# Altium PCB zulu_a7.PcbDoc (part 3 of 3)
Units mm, origin at the board's own origin, x right, y up, seen from the top; angles counter-clockwise.
Board outline 69.85 x 25.4 mm, 6 copper layers (Top Layer, L2-GND, L3-SIG, L4-SIG, L5-VCC3V3, Bottom Layer), stack 1.65 mm thick; 178 components, 177 nets, 839 pads, 377 vias.
Unrouted connection lines stored in the file: 262.
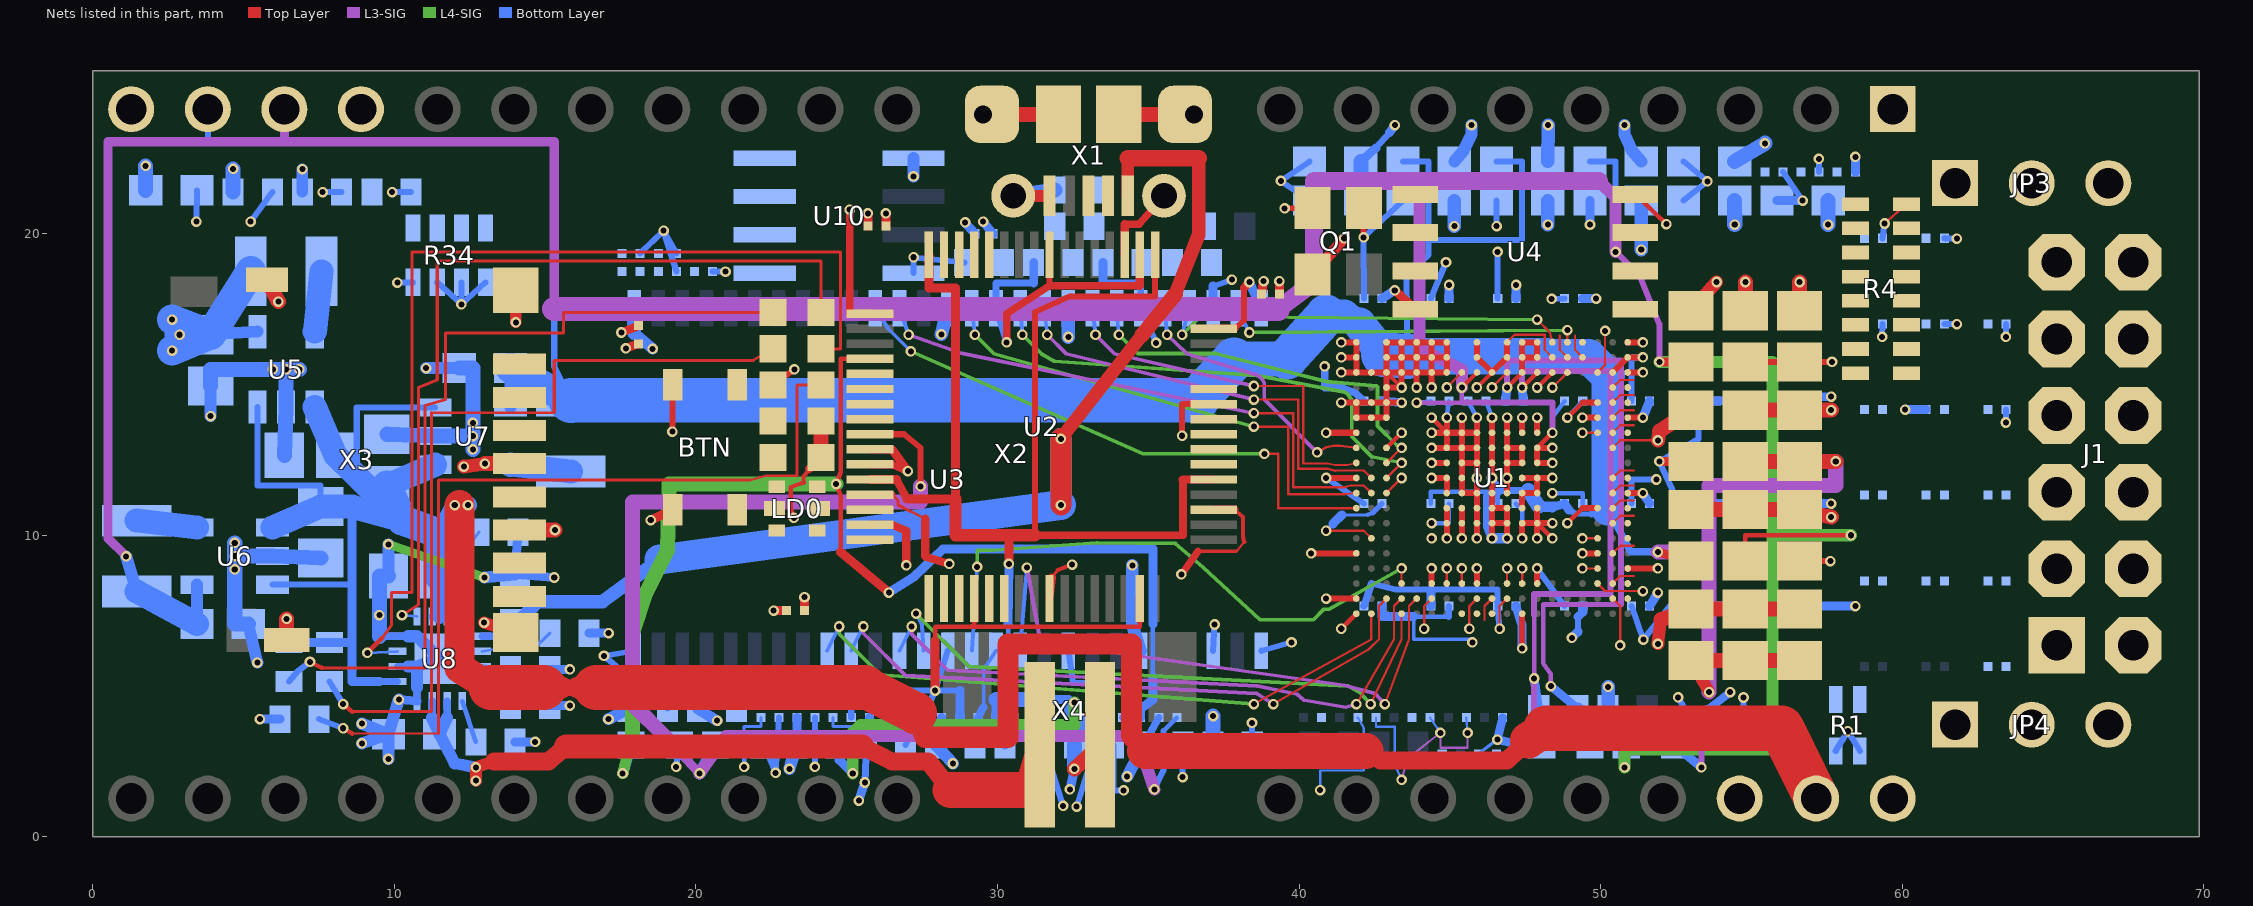
[diagram p6: the nets of this part, all layers, seen from the top]

## Via types
v1: diameter 0.35, hole 0.2, Top Layer to Bottom Layer, tented both sides, 377 vias

## Nets (pads, with @x,y where several pads share a name; then routed paths per layer and width w, separated by ;. In a path a pad name is that pad's centre, name@x,y a point inside that pad or via, vN(x,y) a via of type N, cw(c..) or ccw(c..) an arc to the next point about the centre after c; other vN are vias at no path point) (continued)
D6: U1.V5 U3.11 | length 20.7
  Top Layer w0.076: v1(42.85,4.4) 43.65,6.55 43.65,7.187 43.65,7.65 U1.V5@43.9,7.9
  L3-SIG w0.125: v1(30.975,8.925) 31.425,6.45 41.5,5.025 42.525,4.75 v1(42.85,4.4)
  Bottom Layer w0.125: U3.11@30.75,6.17 v1(30.975,8.925)
D7: U1.U4 U3.13 | length 19.4
  Top Layer w0.076: U1.U4@43.4,8.4 v1(43.4,8.9)
  L4-SIG w0.125: v1(29.325,8.95) 29.325,9.5 29.875,9.5 33.3,9.75 35.9,9.725 36.825,8.925 38.7,7.2 40.475,7.2 40.825,7.55 41,7.55 v1(43.4,8.9)
  Bottom Layer w0.125: U3.13@29.15,6.17 v1(29.325,8.95)
D8: U1.L1 U3.42 | length 16.4
  Top Layer w0.076: v1(38.5,13.6) 39.646,13.6 39.646,11.36 40.9,11.36 41.5,11.36 U1.L1@41.9,11.4
  L4-SIG w0.125: v1(29.25,16.65) 29.875,16.025 v1(38.5,13.6)
  Bottom Layer w0.125: U3.42@29.15,17.53 v1(29.25,16.65)
D9: U1.K3 U3.44 | length 16.2
  Top Layer w0.076: U1.K3@42.9,11.9 v1(43.4,12.4)
  L4-SIG w0.125: v1(30.825,16.65) 31.45,16.025 31.875,15.775 38.6,15.3 41.5,14.75 41.6,14.7 41.75,14.5 41.75,13.275 42.425,12.6 v1(43.4,12.4)
  Bottom Layer w0.125: U3.44@30.75,17.53 v1(30.825,16.65)
D10: U1.K2 U3.45 | length 14.5
  Top Layer w0.076: v1(38.5,14.5) 39.979,14.5 39.979,12.21 40.9,12.21 40.95,12.205 41.2,12.14 41.688,12.15 42.15,12.15 U1.K2@42.4,11.9
  L3-SIG w0.125: v1(31.65,16.65) 32.275,16.025 v1(38.5,14.5)
  Bottom Layer w0.125: U3.45@31.55,17.53 v1(31.65,16.65)
D11: U1.J1 U3.47 | length 12.5
  Top Layer w0.076: v1(38.5,14.95) 40.145,14.95 40.145,12.38 40.95,12.38 41.2,12.33 41.6,12.33 U1.J1@41.9,12.4
  L3-SIG w0.125: v1(33.25,16.65) 33.875,16.025 v1(38.5,14.95)
  Bottom Layer w0.125: U3.47@33.15,17.53 v1(33.25,16.65)
D12: U1.J3 U3.48 | length 12.9
  Top Layer w0.076: U1.J3@42.9,12.4 v1(43.4,12.9)
  L4-SIG w0.125: v1(34.025,16.65) 34.65,16.025 37.25,16.025 40.9,15.1 42.575,14.95 42.6,14.925 42.6,13.625 43.225,13 v1(43.4,12.9)
  Bottom Layer w0.125: U3.48@33.95,17.53 v1(34.025,16.65)
D13: U1.H1 U3.50 | length 9
  Top Layer w0.076: v1(40.6,12.75) 40.9,12.92 41.15,12.97 41.35,12.97 U1.H1@41.9,12.9
  L3-SIG w0.125: v1(35.625,16.65) 36.275,16.025 38.65,15.3 38.8,15.15 38.85,15.05 38.85,14.5 v1(40.6,12.75)
  Bottom Layer w0.125: U3.50@35.55,17.53 v1(35.625,16.65)
D14: U1.A14 U3.51 | length 13.9
  Top Layer w0.076: v1(47.9,17.15) 48.325,16.725 U1.A14@48.4,16.4
  L4-SIG w0.125: v1(36.125,16.65) 36.725,17.25 38,17.25 v1(47.9,17.15)
  Bottom Layer w0.125: v1(36.125,16.65) U3.51@36.35,17.53
D15: U1.A15 U3.53 | length 11.8
  Top Layer w0.076: U1.A15@48.9,16.4 v1(48.9,16.8)
  L4-SIG w0.125: v1(38.35,16.725) v1(48.9,16.8)
  Bottom Layer w0.125: U3.53@37.95,17.53 v1(38.35,16.725)
DONE: R4.2 U2.22
DONE-PU: R4.9 R4.10
EE-CLK: R96.1 U2.62 U10.2
EE-CS: R98.1 U2.63 U10.1
EE-DATA: R101.2 U2.61 U10.3
EE-DATA-DO: R97.1 R101.1 U10.4
FLASH-CS#: R7.1 U1.K19 U4.1
FLASH-D00: U1.D18 U4.5 | length 0.8
  Top Layer w0.076: U1.D18@50.4,14.9 50.65,15.15 51.112,15.15
FLASH-D01: U1.D19 U4.2
FLASH-D02: R2.1 U1.G18 U4.3 | length 0.8
  Top Layer w0.076: U1.G18@50.4,13.4 50.65,13.65 51.112,13.65
FLASH-D03: R6.1 U1.F18 U4.7 | length 0.8
  Top Layer w0.076: U1.F18@50.4,13.9 50.65,14.15 51.112,14.15
FPGA-CCLK: U1.C11 U4.6 | length 0.7
  Top Layer w0.076: v1(46.4,14.9) U1.C11@46.9,15.4
FPGA-DONE: R4.7 R4.15 U1.U12 | length 0.5
  Top Layer w0.076: U1.U12@47.4,8.4 v1(47.4,8.9)
FPGA-INIT#: R1.1 U1.U11 | length 0.5
  Top Layer w0.076: U1.U11@46.9,8.4 v1(46.9,8.9)
FPGA-TCK: R4.11 R5.2 U1.C8 | length 0.7
  Top Layer w0.076: v1(44.9,14.9) U1.C8@45.4,15.4
FPGA-TDI: R4.14 U1.W10
FPGA-TDO: R4.13 U1.W8
FPGA-TMS: R4.12 U1.W9
FT-PWREN#: U1.P17 U2.60 | length 0.5
  Top Layer w0.076: v1(49.4,9.9) U1.P17@49.9,9.9
FT-REF: R18.2 U2.6
FT-RESETN: R19.1 U2.14
FT-VCORE: C139.2 C152.2 C153.2 C154.2 U2.12 U2.37 U2.49 U2.64 | length 57.3
  Top Layer w0.2: 31.237,10 31.237,17.4 32.4,17.92 35.225,17.92 U2.49@35.225,19.3
  Top Layer w0.26: 31.237,10 36.15,10 36.15,11.85
  Top Layer w0.275: 26.65,11.85 27,11.2
  Top Layer w0.28: 36.15,11.85 U2.37@37.175,11.85
  Top Layer w0.3: U2.12@25.775,11.85 26.65,11.85 ; 27,11.2 28.6,11.2 28.6,18.2 27.725,18.2 U2.64@27.725,19.3 ; v1(30.375,9.05) 30.375,10
  Top Layer w0.4: 28.6,11.2 28.6,10 30.375,10 31.237,10
  L4-SIG w0.39: v1(25.2,2.1) 25.2,3.45
  L4-SIG w0.4: 25.2,3.45 25.45,3.7 32.55,3.7 v1(32.55,4.45)
  Bottom Layer w0.15: 30.35,5.3 30.35,7.05
  Bottom Layer w0.29: 24.75,2.55 v1(25.2,2.1)
  Bottom Layer w0.3: C139.2@24.65,3.05 24.75,2.55 ; C152.2@29.949,3.95 29.949,4.55 ; 30.35,4.55 30.35,5.3 ; 30.35,7.05 v1(30.375,9.05) ; C153.2@31.149,3.95 31.149,4.55 32.349,4.55 ; C154.2@32.349,3.95 32.349,4.55 ; v1(32.55,4.45) 32.349,4.55
  Bottom Layer w0.5: 29.949,4.55 30.35,4.55 31.149,4.55
FT-VPHY: C40.2 L4.1 U2.4 | length 41
  Top Layer w0.15: 24.8,9.45 24.8,11.3 v1(24.65,11.7) 24.8,12.1 24.8,15.85 U2.4@25.775,15.85
  Top Layer w0.3: 24.8,9.45 v1(26.4,8.1)
  L4-SIG w0.37: v1(17.57,2.1) 17.9,3.4
  L4-SIG w0.5: 17.9,3.4 17.9,6.8 18.3,8 19.05,9.5 19.1,11.7 v1(24.65,11.7)
  Bottom Layer w0.15: 35.15,5.3 35.15,7.05
  Bottom Layer w0.3: v1(26.4,8.1) 27.2,8.6 28.2,9.55 35.15,9.55 35.15,7.05 ; C40.2@34.749,3.95 34.749,4.25 35.15,4.55 35.15,5.3
  Bottom Layer w0.37: v1(17.57,2.1) L4.1@17.85,3.05
FT-VPLL: C41.2 L5.1 U2.9 | length 43.8
  Top Layer w0.2: U2.9@25.775,13.35 26.9,13.35 27.45,12.9 v1(27.45,11.625)
  L3-SIG w0.3: 19,3.3 v1(20.12,2.1)
  L3-SIG w0.39: v1(20.12,2.1) 21,3.35
  L3-SIG w0.4: 21,3.35 34.6,3.35 v1(35.2,1.575)
  L3-SIG w0.5: 19,3.3 17.9,4.4 17.9,7.4 17.9,11.1 27.45,11.1 v1(27.45,11.625)
  Bottom Layer w0.15: 35.5,3.5 C41.2@35.949,3.95
  Bottom Layer w0.2: v1(35.2,1.575) 35.5,2.2 35.5,3.5
  Bottom Layer w0.39: v1(20.12,2.1) L5.1@20.65,3.05
GND: C3.1 C4.1 C5.1 C6.1 C7.1 C8.1 C9.1 C11.1 C12.1 C13.1 C38.1 C40.1 C41.1 C78.1 C80.1 C82.1 C84.1 C85.2 C86.2 C87.2 C88.2 C89.2 C90.2 C91.2 C92.2 C93.2 C94.2 C95.2 C96.2 C97.2 C98.2 C99.2 C100.2 C101.2 C102.2 C103.2 C104.2 C105.2 C106.2 C107.2 C108.2 C109.2 C110.2 C111.2 C112.2 C113.2 C114.2 C115.2 C116.2 C117.2 C118.2 C119.2 C120.2 C121.2 C122.2 C133.1 C134.1 C135.1 C136.1 C137.1 C138.1 C139.1 C140.2 C141.2 C142.2 C143.2 C144.2 C145.2 C146.2 C147.1 C148.1 C149.1 C150.1 C151.1 C152.1 C153.1 C154.1 C155.1 C156.1 C157.1 C158.1 C159.1 J1.5 J1.11 JP3.3 L6.1 LD1.K LD2.K Q1.2 R5.1 R11.1 R13.2 R15.1 R17.2 R18.1 R21.1 R22.1 R78.1 R86.1 R102.1 R103.1 R104.1 R105.1 R106.1 U1.A1 U1.A3 U1.A4 U1.A5 U1.A6 U1.A7 U1.A9 U1.A11 U1.A19 U1.B1 U1.B3 U1.B4 U1.B5 U1.B6 U1.B7 U1.B9 U1.B11 U1.B14 U1.C1 U1.C2 U1.C3 U1.C4 U1.C5 U1.C6 U1.C7 U1.C10 U1.C19 U1.D3 U1.E1 U1.E2 U1.E3 U1.E17 U1.F1 U1.F2 U1.F3 U1.F19 U1.G1 U1.G7 U1.G8 U1.G9 U1.G11 U1.H7 U1.H8 U1.H9 U1.H11 U1.H12 U1.H18 U1.J8 U1.J9 U1.J11 U1.J12 U1.K8 U1.L8 U1.L9 U1.L11 U1.L19 U1.M9 U1.M13 U1.N9 U1.N12 U1.N13 U1.P2 U1.T19 U1.U6 U1.U9 U1.V18 U1.W1 U1.W12 U2.1 U2.5 U2.10 U2.11 U2.13 U2.15 U2.25 U2.35 U2.47 U2.51 U3.6 U3.12 U3.28 U3.41 U3.46 U3.52 U3.54 U4.4 U5.2 U6.2 U7.2 U8.4 U8.6 U8.8 U8.17 U10.5 X1.5 X1.MH1 X1.MH2 X1.MP1 X1.MP2 X1.MP3 X1.MP4 X1.MS1 X1.MS2 X2.1 X2.20 X2.21 X3.6 X3.G1 X3.G2 X3.G3 X3.G4 X4.2 | length 264.7
  Top Layer w0.076: 37.93,9.47 38.056,9.622 38.18,9.78 ; v1(40.9,10.15) 42.15,10.15 U1.P2@42.4,9.9 ; U1.A11@46.9,16.4 47.15,16.65 48.15,16.65 48.15,16.15 U1.B14@48.4,15.9 ; U1.V18@50.4,7.9 50.65,7.65 v1(50.65,6.35) ; U1.H18@50.4,12.9 50.65,13.15 v1(51.9,13.15)
  Top Layer w0.1: U2.13@26.5,11.35 26.7,11.15 26.7,11 27.6,10.55
  Top Layer w0.105: 36.65,9.47 37.93,9.47
  Top Layer w0.11: U2.25@31.8,8.6 32,8.85
  Top Layer w0.13: U2.35@37.85,10.85 38.14,10.6 38.14,9.95
  Top Layer w0.14: 23.57,11.75 23.57,11.95 LD1.K@23.76,12.2 ; 38.14,9.95 38.18,9.78
  Top Layer w0.145: 32,8.85 v1(32.475,9.025)
  Top Layer w0.15: v1(23.25,10.575) 23.15,10.9 23.15,11.6 23.57,11.75 ; v1(41.4,6.9) U1.W1@41.9,7.4 ; U1.C3@42.9,15.4 v1(43.4,14.9) ; v1(44.4,13.9) U1.G7@44.9,13.4 ; v1(45.9,14.9) U1.C10@46.4,15.4 ; U1.N13@47.9,10.4 v1(48.4,9.9) ; v1(48.9,13.9) 49.4,14.4
  Top Layer w0.18: U2.47@37.85,16.85 38.175,17.125
  Top Layer w0.2: v1(40.9,13.4) U1.G1@41.9,13.4 ; v1(41.4,14.4) U1.E1@41.9,14.4 ; v1(41.4,15.4) U1.C1@41.9,15.4 ; v1(41.4,15.9) U1.B1@41.9,15.9 ; v1(41.4,16.4) U1.A1@41.9,16.4 U1.B1@41.9,15.9 ; v1(43.4,14.4) U1.E3@42.9,14.4 ; v1(43.9,14.9) U1.C5@43.9,15.4 ; U1.U6@44.4,8.4 v1(44.4,8.9) ; v1(44.4,12.9) U1.H7@44.9,12.9 ; v1(44.4,13.4) U1.G7@44.9,13.4 ; v1(44.4,14.9) U1.C6@44.4,15.4 ; v1(44.9,13.9) U1.G7@44.9,13.4 ; v1(45.4,13.9) U1.G8@45.4,13.4 ; U1.U9@45.9,8.4 v1(45.9,8.9) ; v1(45.9,9.9) U1.N9@45.9,10.4 U1.M9@45.9,10.9 U1.L9@45.9,11.4 ; v1(45.9,13.9) U1.G9@45.9,13.4 ; U1.A9@45.9,16.4 U1.B9@45.9,15.9 U1.C10@46.4,15.4 U1.B11@46.9,15.9 U1.A11@46.9,16.4 ; U1.L11@46.9,11.4 v1(46.9,11.9) U1.J11@46.9,12.4 ; v1(46.9,13.9) U1.G11@46.9,13.4 U1.H11@46.9,12.9 ; v1(47.4,6.25) U1.W12@47.4,7.4 ; v1(47.4,9.9) U1.N12@47.4,10.4 U1.N13@47.9,10.4 ; v1(47.9,9.9) U1.N13@47.9,10.4 ; U1.M13@47.9,10.9 U1.N13@47.9,10.4 ; v1(48.4,10.4) U1.N13@47.9,10.4 ; 49.4,14.4 U1.E17@49.9,14.4 ; U1.T19@50.9,8.9 v1(51.9,8.9) ; U1.L19@50.9,11.4 v1(51.4,11.4) ; U1.F19@50.9,13.9 v1(51.4,13.9) ; U1.C19@50.9,15.4 v1(51.4,15.4) ; U1.A19@50.9,16.4 v1(51.4,16.4) ; U1.E1@41.9,14.4 U1.F1@41.9,13.9 U1.F2@42.4,13.9 U1.F3@42.9,13.9 ; U1.E1@41.9,14.4 U1.E2@42.4,14.4 U1.E3@42.9,14.4 ; U1.C1@41.9,15.4 U1.C2@42.4,15.4 U1.C3@42.9,15.4 ; U1.C1@41.9,15.4 U1.B1@41.9,15.9 ; U1.F3@42.9,13.9 U1.E3@42.9,14.4 ; U1.F3@42.9,13.9 U1.E3@42.9,14.4 ; U1.E3@42.9,14.4 U1.D3@42.9,14.9 ; U1.D3@42.9,14.9 U1.C3@42.9,15.4 ; U1.D3@42.9,14.9 v1(43.4,14.9) U1.C4@43.4,15.4 ; U1.C3@42.9,15.4 U1.B3@42.9,15.9 ; U1.C3@42.9,15.4 U1.C4@43.4,15.4 ; U1.B3@42.9,15.9 U1.B4@43.4,15.9 ; U1.B3@42.9,15.9 U1.A3@42.9,16.4 U1.A4@43.4,16.4 ; U1.C4@43.4,15.4 U1.B4@43.4,15.9 ; U1.C4@43.4,15.4 U1.C5@43.9,15.4 ; U1.B4@43.4,15.9 U1.B5@43.9,15.9 ; U1.B4@43.4,15.9 U1.A4@43.4,16.4 ; U1.A4@43.4,16.4 U1.A5@43.9,16.4 ; U1.C5@43.9,15.4 U1.B5@43.9,15.9 ; U1.C5@43.9,15.4 U1.C6@44.4,15.4 ; U1.B5@43.9,15.9 U1.B6@44.4,15.9 ; U1.B5@43.9,15.9 U1.A5@43.9,16.4 ; U1.A5@43.9,16.4 U1.A6@44.4,16.4 ; U1.C6@44.4,15.4 U1.B6@44.4,15.9 ; U1.C6@44.4,15.4 U1.C7@44.9,15.4 ; U1.C6@44.4,15.4 U1.C7@44.9,15.4 ; U1.B6@44.4,15.9 U1.B7@44.9,15.9 ; U1.B6@44.4,15.9 U1.A6@44.4,16.4 ; U1.A6@44.4,16.4 U1.A7@44.9,16.4 U1.B7@44.9,15.9 ; U1.H7@44.9,12.9 U1.H8@45.4,12.9 ; U1.H7@44.9,12.9 U1.G7@44.9,13.4 ; U1.G7@44.9,13.4 U1.G8@45.4,13.4 ; U1.C7@44.9,15.4 U1.B7@44.9,15.9 ; U1.J8@45.4,12.4 U1.K8@45.4,11.9 U1.L8@45.4,11.4 U1.L9@45.9,11.4 ; U1.J8@45.4,12.4 U1.J9@45.9,12.4 ; U1.J8@45.4,12.4 U1.H8@45.4,12.9 ; U1.H8@45.4,12.9 U1.H9@45.9,12.9 ; U1.H8@45.4,12.9 U1.G8@45.4,13.4 ; U1.G8@45.4,13.4 U1.G9@45.9,13.4 ; U1.L9@45.9,11.4 v1(45.9,11.9) U1.J9@45.9,12.4 ; U1.J9@45.9,12.4 U1.H9@45.9,12.9 ; U1.H9@45.9,12.9 U1.G9@45.9,13.4 ; U1.J11@46.9,12.4 U1.J12@47.4,12.4 U1.H12@47.4,12.9 U1.H11@46.9,12.9 ; U1.J11@46.9,12.4 U1.H11@46.9,12.9
  Top Layer w0.21: 38.175,17.125 38.175,18.2
  Top Layer w0.22: U2.13@25.775,11.35 U2.13@26.5,11.35
  Top Layer w0.24: v1(36.1,8.7) 36.65,9.47
  Top Layer w0.245: 34.225,20.32 34.7,20.32 X1.MH2@35.52,21.258
  Top Layer w0.26: v1(25.1,20.8) 25.1,17.35 U2.1@25.775,17.35 ; U2.11@26.5,12.35 v1(27.025,12.125)
  Top Layer w0.27: U2.25@31.725,7.9 U2.25@31.8,8.6
  Top Layer w0.28: LD1.K@23.76,12.2 LD1.K@24.15,12.585 ; U2.15@25.775,10.35 26.5,10.35 26.975,10.15 v1(26.975,9) ; U2.11@25.775,12.35 U2.11@26.5,12.35 ; U2.10@25.775,12.85 26.5,12.85 v1(27.025,12.125) ; 27.6,10.55 27.6,9.3 v1(28.4,9.05) ; U2.51@34.225,19.3 34.225,20.32 ; U2.35@37.175,10.85 U2.35@37.85,10.85 ; U2.47@37.175,16.85 U2.47@37.85,16.85 ; 38.175,18.2 v1(38.35,18.4)
  Top Layer w0.3: v1(17.525,16.725) C158.1@18.1,16.95 ; C159.1@23.6,7.5 v1(23.6,7.95) ; C155.1@26.3,20.25 v1(26.3,20.675) ; C157.1@39.35,18 v1(39.35,18.425) ; v1(43.175,18.125) U4.4@43.85,17.495
  Top Layer w0.365: Q1.2@40.45,18.65 v1(41.5,19.85)
  Top Layer w0.38: v1(14.025,17.06) X3.G4@14.025,18.125
  Top Layer w0.4: v1(12.975,7.1) X3.G1@14.025,6.775 ; X1.MH1@30.52,21.258 X1.5@31.72,21.258
  Top Layer w0.425: v1(51.9,6.4) 52,7.2
  Top Layer w0.43: C93.2@53,17.449 v1(53.85,18.4)
  Top Layer w0.465: v1(51.9,13.15) 51.95,13.45
  Top Layer w0.5: X3.G3@5.775,18.475 v1(6.15,17.75) ; X3.G2@6.425,6.525 v1(6.425,7.225) ; X3.6@14.15,10.175 v1(15.325,10.175) ; LD1.K@24.15,12.585 LD2.K@24.15,13.785 ; X1.MS1@29.52,23.959 X1.MP2@32.02,23.959 ; v1(32.55,2.25) X4.2@33.4,3.05 ; X1.MP3@34.02,23.959 X1.MS2@36.52,23.959 ; 51.95,13.45 C146.2@53,14.149 ; 52,7.2 C140.2@53,7.55 C141.2@54.8,7.55 C142.2@56.6,7.55 ; C143.2@53,10.849 C144.2@54.8,10.849 C145.2@56.6,10.849 v1(57.65,10.6) ; C85.2@54.8,14.149 C86.2@56.6,14.149 v1(57.65,14.149) ; C97.2@54.8,17.449 v1(54.8,18.4) ; C98.2@56.6,17.449 v1(56.6,18.4)
  L4-SIG w0.3: v1(9.8,9.7) v1(12.98,8.6)
  Bottom Layer w0.076: v1(40.7,1.55) 40.7,2.2 42.15,2.2 42.15,3.6 R13.2@41.95,3.95
  Bottom Layer w0.1: 21.6,3.45 21.6,3.65 22.15,3.65 C133.1@22.15,3.95 ; C135.1@24.55,3.95 24.55,3.65 25.75,3.65 26.95,3.65 C137.1@26.95,3.95 ; C152.1@29.349,3.95 29.35,3.65 30.5,3.65 31.75,3.65 C154.1@31.749,3.95
  Bottom Layer w0.105: R11.1@45.95,2.75 v1(46.575,3.225)
  Bottom Layer w0.11: 41.425,10.675 42.275,10.675 ; 43.8,7.3 43.8,6.55 45.65,6.55 v1(45.75,6.45)
  Bottom Layer w0.115: 29.54,4.3 29.54,5.55
  Bottom Layer w0.13: 29.54,5.55 U3.12@29.95,6.17 ; C154.1@31.749,3.95 C6.1@32.55,3.05 ; v1(40.9,10.15) 41.125,10.375
  Bottom Layer w0.145: 42.275,10.675 42.45,10.75
  Bottom Layer w0.15: v1(21.6,2.316) 21.6,3.45 ; v1(44.4,10.4) 44.97,10.4 C90.2@44.97,11.05 ; v1(44.9,13.9) C96.2@44.97,14.45 ; C92.2@45.6,14.45 v1(45.9,13.9) ; C89.2@47.19,11.05 47.4,10.84 v1(47.4,9.9) ; v1(48.4,11.4) 49.41,11.4 C91.2@49.41,11.05 ; v1(48.9,13.9) C95.2@49.41,14.45
  Bottom Layer w0.16: 43.8,7.3 44.97,7.3
  Bottom Layer w0.18: 42.45,10.75 C108.2@42.75,11.05
  Bottom Layer w0.205: 37.15,18.26 v1(37.775,18.475)
  Bottom Layer w0.21: C106.2@42.55,22.85 43,23.35 ; 44.97,7.3 C109.2@44.97,7.65 ; 49.25,6.8 49.25,7.3
  Bottom Layer w0.23: v1(25.6,1.8) C3.1@25.65,3.05 ; C40.1@34.149,3.95 C7.1@34.85,3.05
  Bottom Layer w0.24: 9.5,6.65 U8.8@10.1,6.65 10.45,6.65 ; U8.6@10.1,5.65 10.45,5.65 ; U8.4@10.75,4.5 10.75,4.95
  Bottom Layer w0.255: C152.1@29.349,3.95 29.54,4.3
  Bottom Layer w0.26: C7.1@34.85,3.05 C41.1@35.349,3.95
  Bottom Layer w0.265: 53.55,4.22 v1(54.3,4.8)
  Bottom Layer w0.28: 49.25,7.3 49.41,7.45
  Bottom Layer w0.29: v1(46.575,3.225) R17.2@46.75,3.95
  Bottom Layer w0.295: v1(46.575,3.225) 47.3,3.05
  Bottom Layer w0.3: v1(5.535,3.9) R78.1@6.2,3.9 ; v1(10.15,4.55) U8.4@10.75,4.5 ; R106.1@14.001,3.147 v1(14.667,3.147) ; R103.1@14.1,10.1 C150.1@14.002,8.7 v1(15.3,8.6) ; R102.1@15.151,4.349 v1(15.817,4.349) ; R105.1@15.151,5.55 v1(15.817,5.55) ; R104.1@16.453,6.752 v1(17.103,6.752) ; C139.1@23.35,3.05 C134.1@23.35,3.95 ; v1(25.4,1.2) v1(25.6,1.8) ; C3.1@25.65,3.05 25.75,3.65 C136.1@25.75,3.95 ; C4.1@27.95,3.05 C138.1@28.15,3.95 ; v1(29.525,20.4) C156.1@29.85,20 ; C5.1@30.25,3.05 30.5,3.65 C153.1@30.549,3.95 ; v1(32.4,1.575) v1(32.55,2.25) ; C6.1@32.55,3.05 C38.1@32.949,3.95 ; U3.52@37.15,17.53 37.15,18.26 ; v1(38.35,18.4) U3.54@38.75,17.53 ; 41.125,10.375 41.425,10.675 ; C106.2@42.05,22.4 C106.2@42.55,22.85 ; C113.2@42.75,7.65 42.75,7.3 43.8,7.3 ; C112.2@42.75,14.45 v1(43.4,14.4) ; C120.2@42.75,17.85 v1(43.175,18.125) ; 43,23.35 v1(43.18,23.6) ; C117.2@44.97,17.85 v1(44.975,18.3) ; C107.2@47.19,7.65 47.4,7 v1(47.4,6.25) ; C116.2@47.19,17.85 v1(47.2,18.3) ; v1(49.05,6.6) 49.25,6.8 ; 49.41,7.45 C110.2@49.41,7.65 ; C118.2@49.41,17.85 v1(49.85,17.85) ; v1(51.4,11.4) C111.2@51.63,11.05 ; v1(51.4,13.9) C114.2@51.63,14.45 ; C115.2@51.63,7.65 v1(51.9,8.1) ; R22.1@53.55,3.95 53.55,4.22 ; C122.2@53.85,7.65 v1(58.45,7.65) ; C119.2@53.85,11.05 v1(57.65,11.05) ; C121.2@53.85,14.45 v1(57.65,14.6) ; v1(60.1,14.17) R5.1@60.8,14.17
  Bottom Layer w0.36: R18.1@20.05,4.25 v1(20.7,3.85)
  Bottom Layer w0.37: 17.95,16.7 v1(18.56,16.18)
  Bottom Layer w0.38: C12.1@6.95,21.39 v1(6.95,22.14)
  Bottom Layer w0.4: v1(3.906,13.952) C80.1@3.906,14.952 ; C82.1@5.154,7.058 v1(5.454,5.779) ; v1(8.92,3.1) C151.1@9.8,3.398 ; v1(8.92,3.75) C151.1@9.8,3.398 ; v1(9.8,2.58) C151.1@9.8,3.398 ; C78.1@9.8,8.651 v1(9.8,9.7) ; v1(10.15,4.55) C151.1@9.8,3.398 ; 10.45,5.65 U8.17@10.75,5.65 ; 10.45,6.65 10.75,6.65 U8.17@11.5,5.9 U8.17@10.75,5.65 ; 10.75,4.95 U8.17@10.75,5.65 ; v1(11.05,15.542) C84.1@12.15,15.542 ; v1(12.98,8.6) C150.1@14.002,8.7 ; v1(17.1,3.9) C9.1@17.75,4.25 ; v1(23.1,2.25) C139.1@23.35,3.05 ; v1(27.215,21.9) U10.5@27.215,22.505 ; C4.1@27.95,3.05 v1(28.52,2.43) ; v1(34.3,2) C7.1@34.85,3.05 ; C87.2@45.15,22.4 45.45,22.75 45.72,23.3 v1(45.72,23.6) ; v1(50.8,23.6) 50.8,23.3 51.05,22.75 C94.2@51.349,22.4
  Bottom Layer w0.41: v1(34.475,9) 34.475,7 U3.6@34.75,6.17
  Bottom Layer w0.45: 17.95,16.7 U3.28@17.95,17.53 ; v1(28.14,16.66) U3.41@28.35,17.53 ; v1(32.35,16.575) U3.46@32.35,17.53 ; v1(45.15,20.25) C101.2@45.15,21.1 ; 47.3,3.05 L6.1@48.05,3.05 ; v1(48.25,20.3) C102.2@48.249,21.1 ; C88.2@48.249,22.4 v1(48.26,23.6) ; R21.1@50.25,4.25 v1(50.25,4.975) ; v1(51.35,19.475) C103.2@51.349,21.1
  Bottom Layer w0.5: C13.1@1.75,21.44 v1(1.75,22.25) ; C80.1@3.906,14.952 3.906,15.502 v1(5.968,15.502) v1(6.408,15.502) ; C11.1@4.65,21.39 v1(4.65,22.15) ; v1(4.704,9.75) v1(4.704,9.31) ; C82.1@5.154,7.058 4.704,7.058 v1(4.704,8.87) v1(4.704,9.31) ; C147.1@6.348,12.651 U5.2@6.408,14.252 v1(6.408,15.502) ; v1(6.848,15.502) v1(6.408,15.502) ; C148.1@7.555,9.25 U6.2@5.954,9.31 v1(4.704,9.31) ; 9.5,6.65 v1(9.5,7.35) 9.5,8.651 C78.1@9.8,8.651 ; C149.1@9.748,13.35 U7.2@11.35,13.29 v1(12.6,13.29) ; C84.1@12.15,15.542 12.6,15.542 v1(12.6,13.73) v1(12.6,13.29) ; v1(12.6,12.85) v1(12.6,13.29) ; X1.MH1@30.52,21.258 R86.1@31.9,21.45 ; v1(32.55,2.25) C6.1@32.55,3.05 ; C8.1@37.15,3.05 v1(37.15,4) ; C100.2@42.05,21.1 C106.2@42.05,22.4 ; C104.2@54.449,21.1 v1(54.45,20.3) ; C99.2@54.449,22.4 v1(55.45,23) ; C105.2@57.549,21.1 v1(57.55,20.3)
GNDADC: C123.2 C124.2 L6.2 U1.A12 U1.A13 U1.B12 U1.B13 U1.C12 | length 24.2
  Top Layer w0.15: v1(46.9,14.9) U1.C12@47.4,15.4
  Top Layer w0.2: U1.C12@47.4,15.4 U1.B12@47.4,15.9 ; U1.B12@47.4,15.9 U1.B13@47.9,15.9 U1.A13@47.9,16.4 U1.A12@47.4,16.4 U1.B12@47.4,15.9
  L3-SIG w0.15: 48.1,7.35 48.1,5.75 48.35,5.4 v1(48.35,5)
  L3-SIG w0.16: 48.1,7.35 48.1,7.7 50.68,7.7
  L3-SIG w0.2: v1(46.9,14.9) 46.9,15.8 50.68,15.8 50.68,7.7
  Bottom Layer w0.285: v1(48.35,5) C124.2@49.25,4.25
  Bottom Layer w0.3: C123.2@46.85,14.45 v1(46.9,14.9)
  Bottom Layer w0.4: C124.2@49.25,4.25 L6.2@49.65,3.05
JA1: R26.1 U1.U18 | length 0.8
  Top Layer w0.076: U1.U18@50.4,8.4 50.65,8.65 51.112,8.65
JA2: R27.1 U1.U19
JA3: R28.1 U1.G17 | length 0.5
  Top Layer w0.076: v1(49.4,13.4) U1.G17@49.9,13.4
JA4: R29.1 U1.C17 | length 1.5
  Top Layer w0.076: U1.C17@49.9,15.4 50.15,15.65 v1(50.15,16.78)
JA7: R30.2 U1.T17 | length 0.5
  Top Layer w0.076: v1(49.4,8.9) U1.T17@49.9,8.9
JA8: R31.2 U1.E19
JA9: R32.2 U1.V19
JA10: R33.2 U1.U17 | length 1.6
  Top Layer w0.076: U1.U17@49.9,8.4 50.15,8.15 v1(51.4,8.15)
LD5_K: LD5.K R78.2 | length 28.2
  Top Layer w0.076: 8.6,3.425 11.455,3.425 ; 21.8,11.825 22.3,11.973 23.35,11.973
  Top Layer w0.1: 11.455,3.425 11.455,11.825 21.8,11.825 ; 23.35,11.973 23.35,14.985 LD5.K@24.15,14.985
  Top Layer w0.15: v1(8.3,3.6) 8.6,3.425
  Bottom Layer w0.2: R78.2@7.5,3.9 v1(8.3,3.6)
LDQM: U1.W4 U3.15 | length 20.6
  Top Layer w0.076: v1(42.375,4.4) 43.4,6.55 U1.W4@43.4,7.4
  L4-SIG w0.125: v1(27.3,7.4) 29.05,5.65 41.625,5 42.05,4.75 v1(42.375,4.4)
  Bottom Layer w0.125: v1(27.3,7.4) 27.5,7.025 U3.15@27.55,6.17
LED0_B: LD0.2 U1.N19
LED0_G: LD0.6 U1.R18 | length 0.8
  Top Layer w0.076: U1.R18@50.4,9.4 50.65,9.65 51.112,9.65
LED0_R: LD0.4 U1.P19
LED1: R83.1 U1.N18 | length 0.8
  Top Layer w0.076: U1.N18@50.4,10.4 50.65,10.65 51.112,10.65
LED2: R84.1 U1.M19
N$BTN: BTN.3 BTN.4 R85.1 R86.2
N$LD0B: LD0.1 R80.2
N$LD0G: LD0.5 R82.2
N$LD0R: LD0.3 R81.2
N$LD1A: LD1.A R83.2
N$LD2A: LD2.A R84.2
NetL1_1: L1.1 U5.5 | length 2
  Bottom Layer w0.8: U5.5@7.358,16.752 L1.1@7.583,18.754
NetL2_1: L2.1 U6.5 | length 2
  Bottom Layer w0.8: L2.1@1.452,10.485 U6.5@3.454,10.26
NetL3_1: L3.1 U7.5 | length 2
  Bottom Layer w0.8: U7.5@13.85,12.34 L3.1@15.851,12.115
NetLD3_A: LD3.A R107.1 | length 27
  Top Layer w0.076: 11.235,14.065 15.3,14.065
  Top Layer w0.1: 8.6,4.15 11.235,4.15 11.235,14.065 ; 15.3,14.065 15.3,15.8 21.9,15.8 LD3.A@22.55,16.185
  Top Layer w0.15: v1(8.3,4.4) 8.6,4.15
  Bottom Layer w0.2: R107.1@7.85,5.15 v1(8.3,4.4)
NetLD3_K: LD3.K U8.7 | length 33.4
  Top Layer w0.1: 9.6,6.6 9.9,7 9.9,8.1 10.575,8.1 10.575,19.4 24.8,19.4 24.8,16.185 LD3.K@24.15,16.185
  Top Layer w0.15: v1(9.1,6.1) 9.6,6.6
  Bottom Layer w0.1: v1(9.1,6.1) U8.7@10.1,6.15
NetLD4_A: LD4.A R108.1 | length 28
  Top Layer w0.1: 7.6,5.6 11.015,5.6 11.015,14.3 11.7,14.5 11.7,16.7 15.6,16.7 15.6,17.385 LD4.A@22.55,17.385
  Top Layer w0.15: v1(7.2,5.8) 7.6,5.6
  Bottom Layer w0.2: R108.1@6.5,5.15 6.8,5.5 v1(7.2,5.8)
NetLD4_K: LD4.K U8.9 | length 27.4
  Top Layer w0.1: v1(10.25,7.35) 10.795,7.7 10.795,14.9 11.42,15.15 11.42,19.1 24.15,19.1 LD4.K@24.15,17.385
  Bottom Layer w0.1: v1(10.25,7.35) U8.9@10.75,7.3
NetR102_2: R102.2 U8.16 | length 1.3
  Bottom Layer w0.1: U8.16@12.9,5.15 13.35,4.9 R102.2@13.851,4.349
NetR103_2: R103.2 U8.12 | length 3
  Bottom Layer w0.1: U8.12@12.25,7.3 12.25,7.75 12.55,8.05 12.55,9.75 R103.2@12.8,10.1
NetR104_2: R104.2 U8.14 | length 2.5
  Bottom Layer w0.1: U8.14@12.9,6.15 13.3,6.22 14.6,6.22 R104.2@15.153,6.752
NetR105_2: R105.2 U8.15 | length 1
  Bottom Layer w0.15: U8.15@12.9,5.65 R105.2@13.851,5.55
NetR106_2: R106.2 U8.1 | length 1.4
  Bottom Layer w0.15: U8.1@12.25,4.5 R106.2@12.702,3.147
NODE_P0: R10.1 R11.2 R12.2
NODE_P1: R14.1 R15.2 R16.2 | length 7.9
  L3-SIG w0.076: v1(43.4,1.89) 43.6,2.6 v1(44.69,3.45) 44.69,2.95 45.59,2.95 v1(45.59,3.45)
  Bottom Layer w0.076: R14.1@42.55,3.95 42.55,3.65 43.17,3.65 43.17,2.42 v1(43.4,1.89) ; R15.2@44.35,3.95 v1(44.69,3.45) ; R16.2@45.55,3.95 v1(45.59,3.45)
PMOD-1: J1.1 R26.2
PMOD-2: J1.2 R27.2
PMOD-3: J1.3 R28.2
PMOD-4: J1.4 R29.2
PMOD-7: J1.7 R30.1
PMOD-8: J1.8 R31.1
PMOD-9: J1.9 R32.1
PMOD-10: J1.10 R33.1
PROG#: R4.1 R99.1 U2.21
PUDC_B: R23.2 U1.E18 | length 0.8
  Top Layer w0.076: U1.E18@50.4,14.4 50.65,14.65 51.112,14.65
RAS#: U1.V3 U3.18 | length 21
  Top Layer w0.076: v1(39.15,4.4) 42.325,6.225 42.65,6.55 42.65,7.187 42.65,7.65 U1.V3@42.9,7.9
  L3-SIG w0.125: v1(25.55,6.975) 25.55,6.75 26.95,5.35 38.6,4.75 v1(39.15,4.4)
  Bottom Layer w0.125: U3.18@25.15,6.17 v1(25.55,6.975)
RST#: R1.2 R4.16 U1.V10 X2.23 | length 0.8
  Top Layer w0.076: 46.15,7.187 46.15,7.65 U1.V10@46.4,7.9
SD-CLK: U1.U8 X3.5 | length 0.5
  Top Layer w0.076: U1.U8@45.4,8.4 v1(45.4,8.9)
SD-CMD: R35.1 U1.U7 X3.3 | length 0.5
  Top Layer w0.076: U1.U7@44.9,8.4 v1(44.9,8.9)
SD-DAT0: R34.1 U1.C15 X3.7 | length 0.7
  Top Layer w0.076: v1(48.4,14.9) U1.C15@48.9,15.4
SD-DAT1: R34.2 U1.B15 X3.8 | length 0.8
  Top Layer w0.076: 48.65,16.612 48.65,16.15 U1.B15@48.9,15.9
SD-DAT2: R34.3 U1.L3 X3.1 | length 0.7
  Top Layer w0.076: U1.L3@42.9,11.4 v1(43.4,11.9)
SD-DAT3: R34.4 U1.A16 X3.2
SDRAM-CLK: U1.M1 U3.38 | length 19.2
  Top Layer w0.076: v1(38.85,12.7) 39.312,12.7 39.312,10.9 40.9,10.9 41.5,10.9 U1.M1@41.9,10.9
  L4-SIG w0.125: v1(27.125,16.1) 34.825,12.7 v1(38.85,12.7)
  Bottom Layer w0.125: U3.38@25.95,17.53 26.375,16.85 v1(27.125,16.1)
SDRAM-CS#: U1.W2 U3.19 | length 20.8
  Top Layer w0.076: v1(38.5,4.4) 42.4,6.55 U1.W2@42.4,7.4
  L4-SIG w0.125: v1(24.75,6.975) 24.75,6.725 26.1,5.375 v1(38.5,4.4)
  Bottom Layer w0.125: U3.19@24.35,6.17 v1(24.75,6.975)
TCK: JP3.1 R4.6 U2.16
TDI: JP4.1 R4.3 R90.1 U2.17
TDO: JP4.2 R4.4 R91.1 U2.18
TMS: JP3.2 R4.5 R92.1 U2.19
UART_FT_CTS#: R93.1 U1.B16 U2.41 | length 0.8
  Top Layer w0.076: 49.15,16.612 49.15,16.15 U1.B16@49.4,15.9
UART_FT_DTR#: U1.M18 U2.43 | length 0.8
  Top Layer w0.076: U1.M18@50.4,10.9 50.65,11.15 51.112,11.15
UART_FT_RTS#: U1.L18 U2.40 | length 0.8
  Top Layer w0.076: U1.L18@50.4,11.4 50.65,11.65 51.112,11.65
UART_FT_RXD: R94.1 U1.G19 U2.39
UART_FT_TXD: U1.K18 U2.38 | length 0.8
  Top Layer w0.076: U1.K18@50.4,11.9 50.65,12.15 51.112,12.15
UDQM: U1.L2 U3.39 | length 19.2
  Top Layer w0.076: v1(38.5,14.05) 39.812,14.05 39.812,11.59 40.9,11.59 41.5,11.59 41.688,11.65 42.15,11.65 U1.L2@42.4,11.4
  L3-SIG w0.125: v1(27.05,16.65) 28.85,16.025 v1(38.5,14.05)
  Bottom Layer w0.125: U3.39@26.75,17.53 v1(27.05,16.65)
USB5V0: C150.2 U8.13 X1.1 | length 39
  Top Layer w0.4: X1.1@34.32,21.259 34.32,22.5
  Top Layer w0.45: v1(32.1,13.2) 34.8,16.65 ; 35.9,18 36.68,20 36.68,22.5
  Top Layer w0.5: 34.8,16.65 35.9,18
  Top Layer w0.55: 34.32,22.5 36.68,22.5
  Top Layer w0.7: v1(32.1,11) v1(32.1,13.2)
  Bottom Layer w0.24: U8.13@12.9,6.65 13.45,6.65
  Bottom Layer w0.4: 13.45,6.65 C150.2@14.002,7
  Bottom Layer w0.45: C150.2@14.002,7 14.75,7.8 16.9,7.8 18.8,9.2
  Bottom Layer w0.7: v1(32.1,11) v1(32.1,13.2)
  Bottom Layer w1: 18.8,9.2 v1(32.1,11)
USB_D_N: U2.7 X1.2
USB_D_P: U2.8 X1.3
VBATT: C151.2 U8.2 U8.3 X4.1 | length 25.6
  Top Layer w0.4: v1(12.7,1.86) v1(12.7,2.3) 13.3,2.5
  Top Layer w0.6: 13.3,2.5 15.1,2.5 15.7,3 ; 25.5,3 26.5,2.5 27.7,2.5 28.45,1.55
  Top Layer w0.8: 15.7,3 25.5,3 ; X4.1@30.95,1.55 X4.1@31.4,3.05
  Top Layer w1.2: 28.45,1.55 X4.1@30.95,1.55
  Bottom Layer w0.24: 11.25,3.949 U8.3@11.25,4.5 ; 11.75,3.949 U8.2@11.75,4.5
  Bottom Layer w0.4: 11.25,3.949 C151.2@11.5,3.398 ; 11.75,3.949 C151.2@11.5,3.398 ; v1(12.7,1.86) v1(12.7,2.3) 12,2.44 C151.2@11.5,3.398
VCC1V0: C84.2 C85.1 C86.1 C87.1 C88.1 C89.1 C90.1 C91.1 C92.1 C140.1 C141.1 C142.1 C143.1 L3.2 U1.G10 U1.H10 U1.J10 U1.L10 U1.M10 U1.M11 U1.N10 U1.N11 U7.4 X2.19 | length 125
  Top Layer w0.2: v1(46.4,9.9) U1.N10@46.4,10.4 ; v1(46.4,13.9) U1.G10@46.4,13.4 U1.H10@46.4,12.9 U1.J10@46.4,12.4 v1(46.4,11.9) U1.L10@46.4,11.4 U1.M10@46.4,10.9 ; v1(46.9,9.9) U1.N11@46.9,10.4 ; U1.N10@46.4,10.4 U1.N11@46.9,10.4 ; U1.N10@46.4,10.4 U1.M10@46.4,10.9 ; U1.M10@46.4,10.9 U1.M11@46.9,10.9 U1.N11@46.9,10.4
  Top Layer w0.3: v1(51.9,9.445) C143.1@53,9.15
  Top Layer w0.4: C140.1@53,5.85 v1(53.6,4.8)
  Top Layer w0.5: C140.1@53,5.85 C141.1@54.8,5.85 C142.1@56.6,5.85 ; C85.1@54.8,12.45 C86.1@56.6,12.45 v1(57.8,12.45)
  L3-SIG w0.5: v1(51.9,9.445) 53.6,9.445 ; v1(53.6,4.8) 53.6,9.445 ; v1(57.8,12.45) 57.8,11.65 53.6,11.65 53.6,9.445
  Bottom Layer w0.15: C90.1@44.37,11.05 44.37,11.45 46.59,11.45 ; C92.1@46.2,14.45 v1(46.4,13.9) ; v1(46.4,11.9) C89.1@46.59,11.05 ; C91.1@48.81,11.05 47.9,11.05 47.5,11.45 46.59,11.45 ; C89.1@46.59,11.05 46.59,11.45 ; C89.1@46.59,11.05 46.59,11.45
  Bottom Layer w0.16: v1(46.4,11.9) 46.75,11.5
  Bottom Layer w0.175: 49.18,10.707 49.7,10.707
  Bottom Layer w0.2: X2.19@3.81,24.13 3.81,23.05 15.3,23.05 15.3,15.6 L3.2@15.851,14.465 ; C87.1@43.45,22.4 44.3,22.4 44.3,19.8 ; 43.6,15.935 43.56,18.6 44.3,19.3 44.3,19.8 ; C88.1@46.55,22.4 47.4,22.4 47.4,19.8 44.3,19.8
  Bottom Layer w0.205: 46.75,11.5 47.6,11.5
  Bottom Layer w0.21: 48.95,10.84 49.18,10.707
  Bottom Layer w0.235: 49.7,10.707 50.23,10.85
  Bottom Layer w0.25: 50.23,10.85 50.6,10.2 51,9.45 v1(51.9,9.445)
  Bottom Layer w0.3: v1(46.4,9.9) 46.25,10.3 46.25,11.3 46.59,11.45 ; 48.4,10.93 C91.1@48.81,11.05 48.95,10.84
  Bottom Layer w0.345: 47.95,10.95 48.4,10.93
  Bottom Layer w0.35: v1(46.4,9.9) v1(46.9,9.9)
  Bottom Layer w0.4: U7.4@13.85,14.24 C84.2@13.85,15.542
  Bottom Layer w0.47: 47.6,11.5 47.95,10.95
  Bottom Layer w0.96: 41.5,17.3 42,17
  Bottom Layer w1: C84.2@13.85,15.542 L3.2@15.851,14.465
  Bottom Layer w1.04: 40.9,17.3 41.5,17.3
  Bottom Layer w1.06: 50.23,10.85 50.23,15.3
  Bottom Layer w1.095: 42,17 42.8,16
  Bottom Layer w1.14: 48.3,15.935 49.6,15.935
  Bottom Layer w1.15: 49.6,15.935 50.23,15.3
  Bottom Layer w1.16: 37.85,15.85 39.6,15.85
  Bottom Layer w1.2: 43.6,15.935 48.3,15.935
  Bottom Layer w1.355: 39.6,15.85 40.9,17.3
  Bottom Layer w1.425: 36.6,14.49 37.85,15.85
  Bottom Layer w1.5: L3.2@15.851,14.465 36.6,14.49 ; 42.8,16 43.6,15.935
VCC1V8: C82.2 C93.1 C94.1 C95.1 C96.1 C144.1 L2.2 L7.1 U1.C9 U1.H13 U1.J13 U6.4 X2.18 | length 138.2
  Top Layer w0.15: v1(45.4,14.9) U1.C9@45.9,15.4 ; U1.H13@47.9,12.9 v1(48.4,13.4) ; C144.1@54.8,9.15 54.8,10 v1(58.3,10)
  Top Layer w0.2: v1(48.4,12.4) U1.J13@47.9,12.4 U1.H13@47.9,12.9 v1(48.4,12.9)
  Top Layer w0.3: v1(51.95,15.75) C93.1@53,15.749
  L3-SIG w0.15: v1(43.9,14.4) 45.4,14.4 v1(45.4,14.9)
  L3-SIG w0.2: 45.4,14.4 48.4,14.4 v1(48.4,13.4) ; v1(50.5,19.4) 51.3,18.6 51.95,17 v1(51.95,15.75)
  L3-SIG w0.3: v1(1.1,9.3) 0.5,9.9 0.5,23.05 6.35,23.05 ; X2.18@6.35,24.13 6.35,23.05 ; 15.3,17.5 15.3,23.05 6.35,23.05
  L3-SIG w0.4: 44,21.75 44,16.2 45.4,15.5 v1(45.4,14.9) ; 49.95,21.75 50.5,21.2 v1(50.5,19.4)
  L3-SIG w0.6: 39.3,17.5 40.5,18.4 40.5,21.75 44,21.75 49.95,21.75
  L3-SIG w0.8: 15.3,17.5 39.3,17.5
  L4-SIG w0.4: v1(50.8,2.3) 50.8,2.9 55.7,2.9 55.7,10 ; v1(51.95,15.75) 55.7,15.75 55.7,10 ; v1(58.3,10) 55.7,10
  Bottom Layer w0.15: v1(43.9,14.4) C96.1@44.37,14.45 ; v1(48.4,13.4) 48.4,13.9 C95.1@48.81,14.45
  Bottom Layer w0.2: C94.1@49.65,22.4 50.5,22.4 v1(50.5,19.4)
  Bottom Layer w0.3: v1(50.8,2.3) L7.1@50.85,3.05
  Bottom Layer w0.4: v1(1.1,9.3) L2.2@1.452,8.135 ; C82.2@3.454,7.058 U6.4@3.454,8.36
  Bottom Layer w0.8: L2.2@1.452,8.135 C82.2@3.454,7.058
VCC3V3: BTN.1 BTN.2 C3.2 C4.2 C5.2 C6.2 C7.2 C8.2 C9.2 C11.2 C12.2 C13.2 C38.2 C80.2 C97.1 C98.1 C99.1 C100.1 C101.1 C102.1 C103.1 C104.1 C105.1 C106.1 C107.1 C108.1 C109.1 C110.1 C111.1 C112.1 C113.1 C114.1 C115.1 C116.1 C117.1 C118.1 C119.1 C120.1 C121.1 C122.1 C133.2 C134.2 C135.2 C136.2 C137.2 C138.2 C145.1 C146.1 C155.2 C156.2 C157.2 C158.2 C159.2 J1.6 J1.12 JP4.3 L1.2 L4.2 L5.2 LD5.A Q1.1 Q1.4 R1.3 R1.4 R2.2 R4.8 R6.2 R7.2 R19.2 R20.2 R23.1 R34.5 R34.6 R34.7 R34.8 R35.2 R80.1 R81.1 R82.1 R90.2 R91.2 R92.2 R93.2 R94.2 R96.2 R97.2 R98.2 R99.2 U1.B19 U1.C14 U1.C18 U1.F17 U1.G12 U1.G13 U1.H3 U1.J7 U1.K1 U1.K7 U1.K12 U1.K13 U1.L7 U1.L12 U1.L13 U1.M7 U1.M8 U1.M12 U1.M17 U1.N7 U1.N8 U1.R1 U1.R17 U1.U13 U1.V1 U1.V6 U1.V9 U1.V11 U2.20 U2.31 U2.42 U2.50 U2.56 U3.1 U3.3 U3.9 U3.14 U3.27 U3.43 U3.49 U4.8 U5.4 U10.8 X2.17 X3.4 | length 165.4
  Top Layer w0.076: v1(44.15,6.9) 44.15,7.65 U1.V6@44.4,7.9 ; v1(45.65,6.9) 45.65,7.65 U1.V9@45.9,7.9 ; v1(46.65,6.9) 46.65,7.65 U1.V11@46.9,7.9
  Top Layer w0.08: v1(59.42,20.34) R4.8@60.15,20.978
  Top Layer w0.145: 27.93,6.5 27.93,6.963 29.225,6.963 ; U2.20@29.225,7.2 29.225,6.963 ; U2.31@34.725,7.2 34.725,6.963 29.225,6.963 ; U4.8@51.15,21.305 v1(52.18,20.32)
  Top Layer w0.15: U1.H3@42.9,12.9 v1(43.4,13.4) ; v1(47.9,14.9) U1.C14@48.4,15.4 ; v1(48.9,10.4) 49.4,10.9
  Top Layer w0.2: v1(19.22,13.44) BTN.2@19.225,14.995 ; LD5.A@22.55,14.985 v1(23.26,15.5) ; 31.725,18.28 U2.56@31.725,19.3 ; v1(36.12,13.3) 36.12,14.35 U2.42@37.175,14.35 ; v1(39.52,20.84) Q1.1@40.45,20.85 ; v1(40.4,9.4) U1.R1@41.9,9.4 ; v1(40.9,7.9) U1.V1@41.9,7.9 ; v1(40.9,11.9) U1.K1@41.9,11.9 ; v1(42.14,19.88) Q1.4@42.15,20.85 ; v1(44.4,11.9) U1.K7@44.9,11.9 U1.L7@44.9,11.4 ; v1(44.4,12.4) U1.J7@44.9,12.4 ; v1(44.9,9.9) U1.N7@44.9,10.4 U1.M7@44.9,10.9 ; v1(45.4,9.9) U1.N8@45.4,10.4 U1.M8@45.4,10.9 ; U1.M12@47.4,10.9 U1.L12@47.4,11.4 U1.L13@47.9,11.4 U1.K13@47.9,11.9 ; U1.K12@47.4,11.9 U1.K13@47.9,11.9 ; U1.G12@47.4,13.4 v1(47.4,13.9) ; U1.U13@47.9,8.4 v1(47.9,8.9) ; U1.G13@47.9,13.4 v1(47.9,13.9) ; v1(48.4,11.9) U1.K13@47.9,11.9 ; v1(49.4,9.4) U1.R17@49.9,9.4 ; 49.4,10.9 U1.M17@49.9,10.9 ; v1(49.4,13.9) U1.F17@49.9,13.9 ; U1.C18@50.4,15.4 U1.B19@50.9,15.9 v1(51.4,15.9) ; C97.1@54.8,15.749 C98.1@56.6,15.749 v1(57.675,15.749) ; C145.1@56.6,9.15 v1(57.62,9.14)
  Top Layer w0.25: v1(30.3,16.4) 30.3,17.35 31.725,18.28 34.725,18.28
  Top Layer w0.28: U2.20@29.225,7.2 U2.20@29.225,7.9 ; U2.31@34.725,7.2 U2.31@34.725,7.9 ; 34.725,18.28 U2.50@34.725,19.3
  Top Layer w0.3: v1(17.675,16.2) C158.2@18.1,16.35 ; v1(18.5,10.5) BTN.1@19.225,10.845 ; v1(22.575,7.5) C159.2@23,7.5 ; C155.2@25.7,20.25 v1(25.7,20.675) ; v1(27.93,4.85) 27.93,6.5 ; C157.2@38.75,18 v1(38.825,18.425) ; v1(51.95,12.45) C146.1@53,12.45
  Top Layer w0.46: v1(12.3,12.275) v1(13,12.375)
  Top Layer w0.5: v1(13,12.375) X3.4@14.15,12.375
  Bottom Layer w0.2: v1(3.433,20.4) C13.2@3.45,21.44 ; v1(5.233,20.4) C11.2@5.95,21.39 ; v1(7.62,21.38) C12.2@8.25,21.39 ; v1(9.92,21.38) R35.2@10.55,21.39 ; v1(10.1,18.38) R34.8@10.62,18.39 ; R34.7@11.42,18.39 v1(12.22,17.66) ; R34.6@12.22,18.39 v1(12.22,17.66) ; R34.5@13.02,18.39 v1(12.22,17.66) ; U3.27@17.95,6.17 v1(16.95,6) C9.2@19.05,4.25 ; R97.2@18.15,19.35 v1(18.925,20.1) ; v1(19.34,2.32) L4.2@19.45,3.05 ; R19.2@19.35,18.75 v1(18.925,20.1) ; R98.2@19.35,19.35 v1(18.925,20.1) ; R96.2@20.55,18.75 v1(20.98,18.74) ; L5.2@22.25,3.05 v1(22.64,2.12) C133.2@22.75,3.95 ; v1(23.94,2.32) C134.2@23.95,3.95 ; C135.2@25.15,3.95 25.15,4.85 26.35,4.85 ; C136.2@26.35,3.95 26.35,4.85 ; C3.2@26.95,3.05 v1(27.93,4.85) ; U10.8@27.215,18.695 v1(27.22,19.22) R80.1@28.9,19.05 ; C137.2@27.55,3.95 v1(27.93,4.85) ; U3.14@28.35,6.17 v1(27.93,4.85) ; C138.2@28.75,3.95 C4.2@29.25,3.05 ; 28.75,4.85 v1(27.93,4.85) ; U3.43@29.95,17.53 v1(30.3,16.4) ; C5.2@31.55,3.05 v1(32.175,1.025) ; U3.9@32.35,6.17 32.5,5.1 33.549,5.1 C38.2@33.549,3.95 v1(32.625,1) ; C6.2@33.85,3.05 33.85,1.54 v1(34.18,1.54) ; U3.49@34.75,17.53 v1(35.26,16.38) ; v1(36.14,1.98) C7.2@36.15,3.05 ; U3.3@37.15,6.17 v1(37.2,7.04) ; v1(38.44,3.78) C8.2@38.45,3.05 ; U3.1@38.75,6.17 v1(39.75,6.45) ; C100.1@40.35,21.1 v1(39.4,21.75) C106.1@40.35,22.4 ; v1(40.9,11.9) C108.1@42.15,11.05 ; C120.1@42.15,17.85 v1(42.14,19.88) C101.1@43.45,21.1 ; 42.4,8.4 43.2,8.2 44.37,8.2 46.59,8.2 C107.1@46.59,7.65 v1(46.65,6.9) ; C117.1@44.37,17.85 v1(44.875,19.05) ; C102.1@46.55,21.1 v1(46.55,20.25) ; C116.1@46.59,17.85 v1(46.59,19.4) ; v1(47.9,8.9) C110.1@48.81,7.65 ; v1(48.38,17.84) C118.1@48.81,17.85 ; C115.1@51.03,7.65 v1(51.42,6.54) 52.3,7.65 C122.1@53.25,7.65 ; C111.1@51.03,11.05 51.03,11.85 v1(51.85,11.85) ; C114.1@51.03,14.45 51.03,15.9 v1(51.4,15.9) ; v1(52.575,4.625) R20.2@52.95,3.95 ; C104.1@52.749,21.1 v1(53.54,21.74) C99.1@52.749,22.4 ; C119.1@53.25,11.05 52.6,11.05 v1(51.95,12.45) 53.25,13.2 C121.1@53.25,14.45 ; v1(54.74,4.62) R23.1@54.75,3.95 ; R2.2@56.049,22.05 v1(56.7,21.1) ; v1(57.24,22.48) R6.2@57.249,22.05 ; R1.4@57.8,2.85 v1(58.2,3.5) R1.3@58.6,2.85 ; v1(59.34,16.58) R91.2@59.35,17.01 ; R94.2@59.35,19.85 v1(59.42,20.34) ; R92.2@61.4,17.01 v1(61.82,17) ; R99.2@61.4,19.85 v1(61.82,19.84) ; v1(63.44,13.74) R90.2@63.45,14.17 ; v1(63.44,16.58) R93.2@63.45,17.01 ; 26.35,4.85 v1(27.93,4.85)
  Bottom Layer w0.23: U3.43@29.95,17.53 29.95,18.365 31.2,18.365 ; 33.5,18.365 34.75,18.365 U3.49@34.75,17.53
  Bottom Layer w0.24: C113.1@42.15,7.65 42.4,8.4
  Bottom Layer w0.25: v1(40.85,15.6) 40.85,14.9 41.4,14.9 41.9,14.7 C112.1@42.15,14.45
  Bottom Layer w0.29: 31.2,18.365 R81.1@31.2,19.05 ; 33.5,18.365 R82.1@33.5,19.05
  Bottom Layer w0.3: C138.2@28.75,3.95 28.75,4.85 ; v1(28.925,20.375) C156.2@29.25,20 ; C109.1@44.37,7.65 44.37,8.2 ; v1(49.65,20.3) C103.1@49.65,21.1 ; C105.1@55.849,21.1 v1(56.7,21.1) ; R7.2@58.449,22.05 v1(58.45,22.55)
  Bottom Layer w0.4: C80.2@3.906,16.652 U5.4@5.458,16.752
  Bottom Layer w1: v1(2.625,16.125) C80.2@3.906,16.652 ; v1(2.625,17.15) C80.2@3.906,16.652 ; v1(2.875,16.65) C80.2@3.906,16.652 ; L1.2@5.233,18.754 C80.2@3.906,16.652
  other v1: 44.4,9.9
VCCADC: C123.1 C124.1 L7.2 U1.C13 | length 28
  Top Layer w0.15: v1(47.4,14.9) U1.C13@47.9,15.4
  L3-SIG w0.15: v1(47.8,5.25) 47.8,7.35
  L3-SIG w0.2: v1(47.4,14.9) 47.4,15.45 50.33,15.45 50.33,8.05 47.8,8.05 47.8,7.35 ; v1(47.8,5.25) 47.8,3.9 53.34,3.9 v1(53.34,2.3)
  Bottom Layer w0.3: v1(47.4,14.9) C123.1@47.45,14.45 ; v1(47.8,5.25) C124.1@47.95,4.25 ; L7.2@52.45,3.05 v1(53.34,2.3)
VU: C78.2 C147.2 C148.2 C149.2 R107.2 R108.2 U5.1 U5.3 U6.1 U6.3 U7.1 U7.3 U8.5 U8.10 U8.11 X2.22 | length 102.1
  Top Layer w0.4: v1(12,11) 12.155,11 v1(12.44,11)
  Top Layer w0.55: 15.58,4.949 16.06,4.949
  Top Layer w0.6: 42.2,2.85 42.7,2.53 46.9,2.53 47.6,3.2
  Top Layer w0.7: 15.29,4.949 15.58,4.949 ; 16.06,4.949 16.35,4.949 ; 27.3,4.1 27.6,3.3 30.35,3.3 30.35,6.4 34.45,6.4 34.45,3.366 34.9,2.85
  Top Layer w1: v1@12.155,11 12.155,5.6 13.2,4.949 ; 14.96,4.949 15.29,4.949 ; 16.35,4.949 16.69,4.949
  Top Layer w1.2: 34.9,2.85 42.2,2.85 ; 47.6,3.2 48.2,3.6
  Top Layer w1.4: 25.6,4.949 27.3,4.1
  Top Layer w1.5: 13.2,4.949 14.96,4.949 ; 16.69,4.949 25.6,4.949 ; 48.2,3.6 56,3.6 X2.22@57.15,1.27
  Bottom Layer w0.2: U5.3@5.458,14.252 5.458,11.65 7.555,11.65 C148.2@7.555,10.95 ; U6.3@5.954,8.36 8.6,8.36 ; C149.2@9.748,11.65 8.75,11.65 8.75,14.24 U7.3@11.35,14.24
  Bottom Layer w0.24: 9.5,5.15 U8.5@10.1,5.15 ; U8.10@11.25,7.3 11.5,7.3 U8.11@11.75,7.3
  Bottom Layer w0.3: R108.2@6.5,6.45 R107.2@7.85,6.45 8.6,6.45 ; 8.6,10.95 8.6,8.36 8.6,6.45 ; 9.5,5.15 8.6,5.15 8.6,6.45
  Bottom Layer w0.5: 11.5,7.3 C78.2@11.5,8.651
  Bottom Layer w0.6: 11.5,10.05 v1(12,11) v1(12.44,11)
  Bottom Layer w0.8: U6.1@5.954,10.26 C148.2@7.555,10.95 8.6,10.95 10.25,10.5 C147.2@8.048,12.651 U5.1@7.358,14.252 ; C149.2@9.748,11.65 U7.1@11.35,12.34
  Bottom Layer w1: C149.2@9.748,11.65 10.25,10.5 11.5,10.05 C78.2@11.5,8.651
WE#: U1.V4 U3.16 | length 20.5
  Top Layer w0.076: v1(41.9,4.4) 43.15,6.55 43.15,7.187 43.15,7.65 U1.V4@43.4,7.9
  L3-SIG w0.125: v1(27.15,6.975) 27.15,6.725 28.35,5.525 38.625,5 39.95,4.725 40.175,4.525 41.55,4.3 v1(41.9,4.4)
  Bottom Layer w0.125: U3.16@26.75,6.17 v1(27.15,6.975)
pads on no net: U1.A2 U1.A8 U1.A10 U1.B2 U1.B8 U1.B10 U1.D1 U1.D2 U2.3 U2.23 U2.24 U2.26 U2.27 U2.28 U2.29 U2.30 U2.32 U2.33 U2.34 U2.36 U2.44 U2.45 U2.46 U2.48 U2.52 U2.53 U2.54 U2.55 U2.57 U2.58 U2.59 U3.40 U10.6 U10.7 X1.4 X3.A X3.B X4.MP1 X4.MP2

## Polygon pours and split planes (outlines as drawn)
GND on L2-GND (split plane): 69.34,0.51 0.51,0.51 0.51,24.89 69.34,24.89
VCC3V3 on L5-VCC3V3 (split plane): 69.34,0.51 0.51,0.51 0.51,24.89 69.34,24.89

## Keep-outs
Top Layer:
  rectangle: 3.075,10.525 5.075,13.025
  rectangle: 7.275,7.575 9.275,16.075

## Silkscreen, mask and mechanical layers (free items; w line width, h text height)
Mechanical 1:
  the board outline again, w0.1

## Text inside footprints (layer, text, board x,y; h text height)
U$2: Mechanical 3 "CC" at 3.027,-7.711 h3.94
U$3: Mechanical 3 "BY" at 9.371,-13.056 h2.76
U$4: Mechanical 3 "SA" at 13.927,-13.056 h2.76
U$5: Mechanical 3 "C" at 19.916,-8.371 h5.91